# EAGLE board Breathalyzer Board Smaller Experiment (EAGLE 7.2.0)
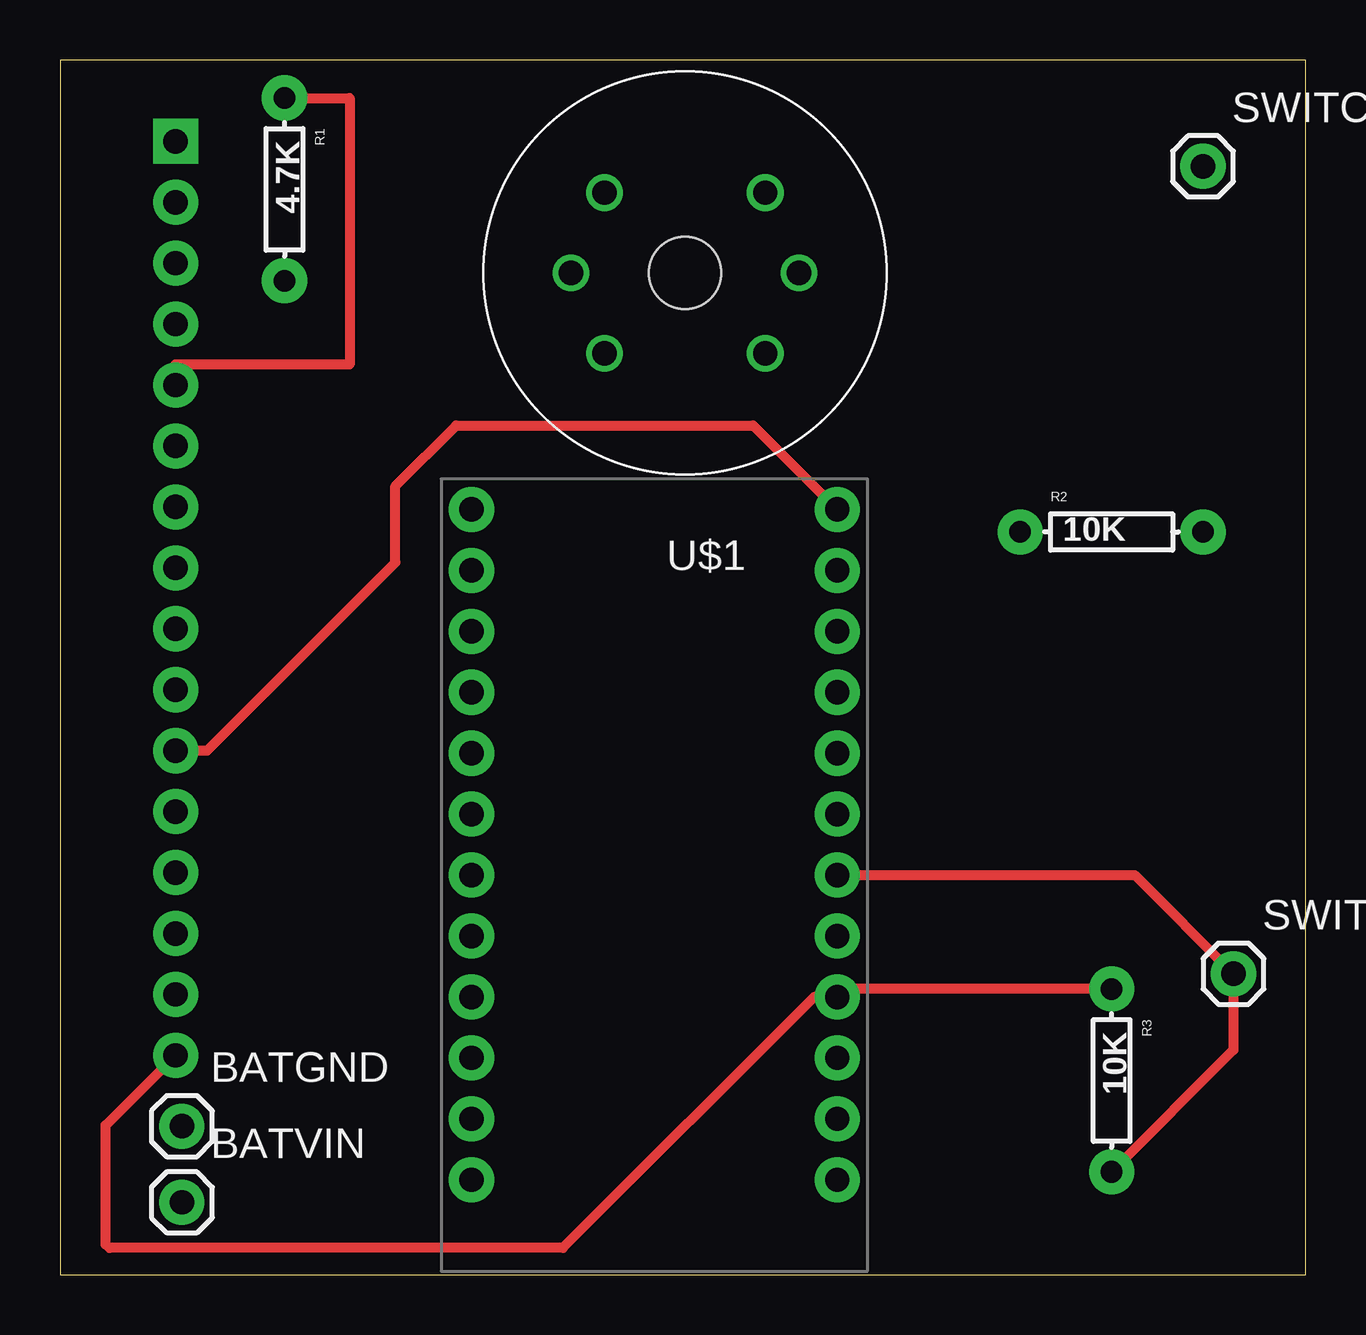
[diagram p0: board, top side]
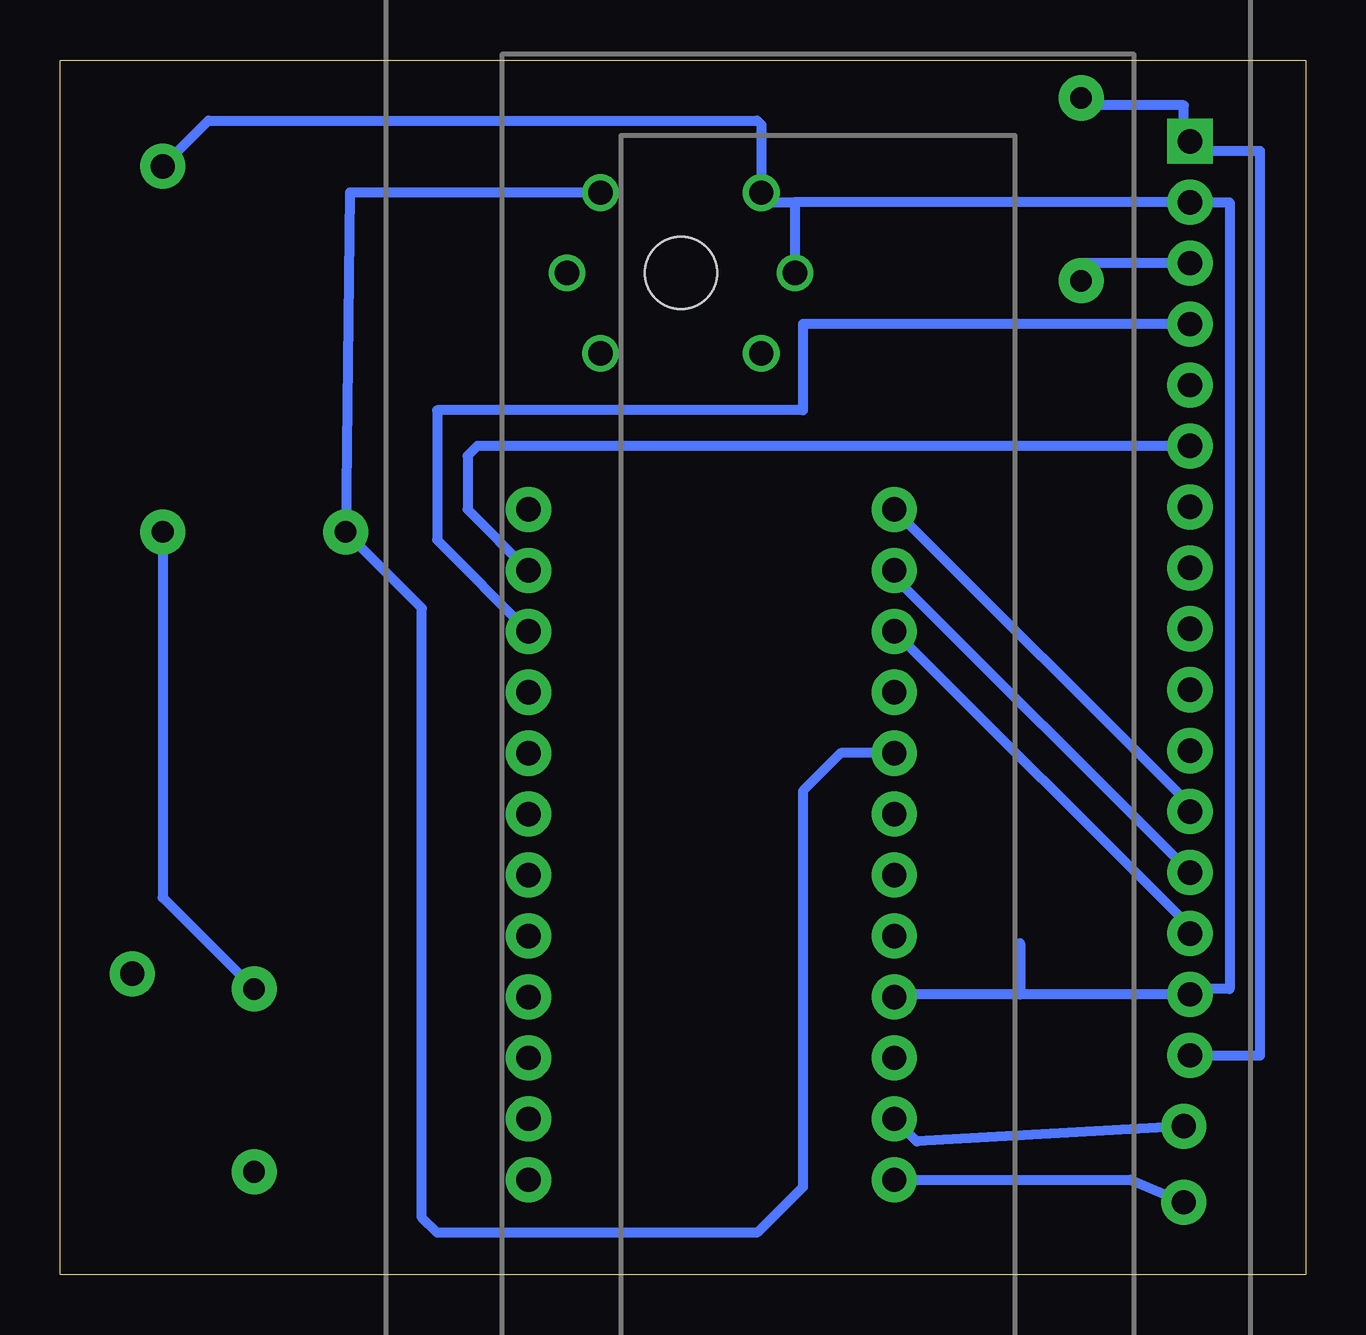
[diagram p1: board, bottom side, seen from below]

Size 51.91 x 50.63 mm. Coordinates in mm from the lower left corner, seen from the top.
Outline: 0,0 51.91,0 51.91,50.63 0,50.63 0,0
Copper layers (1*16): Top 0.035mm / dielectric 1.5mm / Bottom 0.035mm
Design rules "dirt_cheap_dirty_boards.v1": minimum track width 5mil, minimum drill 12mil, track to track 5mil, track to pad 5mil, pad to pad 5mil, via to via 5mil, smd to smd 0mil, copper to edge 10mil, drill to drill 10mil, minimum pad ring 10mil, minimum via ring 6mil, stop-mask expansion 2mil, vias tented up to drill 25mil, thermal gap 10mil

## Footprints (pad centres in the part's own frame; a part is rotated, then mirrored left to right if it is on the bottom)
1X01 = drill 1.016 pad 1.88: 1 0,0
AXIAL-0.3 = drill 0.9 pad 1.88: P$1 -3.81,0; P$2 3.81,0
LCD-16X2_NOHOLES = drill 1.016 pad 1.88 square: 1 -32,15.5 | drill 1.016 pad 1.88: 2 -29.46,15.5; 3 -26.92,15.5; 4 -24.38,15.5; 5 -21.84,15.5; 6 -19.3,15.5; 7 -16.76,15.5; 8 -14.22,15.5; 9 -11.68,15.5; 10 -9.14,15.5; 11 -6.6,15.5; 12 -4.06,15.5; 13 -1.52,15.5; 14 1.02,15.5; 15 3.56,15.5; 16 6.1,15.5
MQ-3 = drill 1.016: A1 -3.35,3.35; A2 -3.35,-3.35; B1 3.35,3.35; B2 3.35,-3.35; HA -4.75,0; HB 4.75,0 | hole 3: 0,0
ARDUINO_MINI = drill 1.016 pad 1.88: 1 -7.62,12.7; 2 -7.62,10.16; 3 -7.62,7.62; 4 -7.62,5.08; 5 -7.62,2.54; 6 -7.62,0; 7 -7.62,-2.54; 8 -7.62,-5.08; 9 -7.62,-7.62; 10 -7.62,-10.16; 11 -7.62,-12.7; 12 -7.62,-15.24; 13 7.62,-15.24; 14 7.62,-12.7; 15 7.62,-10.16; 16 7.62,-7.62; 17 7.62,-5.08; 18 7.62,-2.54; 19 7.62,0; 20 7.62,2.54; 21 7.62,5.08; 22 7.62,7.62; 23 7.62,10.16; 24 7.62,12.7

## Placement (x,y rotation side)
BATGND  M01PTH  [1X01]  5.08,6.19 0 top
BATVIN  M01PTH  [1X01]  5.08,3.02 0 top
FRAME1  FRAME-LETTER  [CREATIVE_COMMONS]  -75.56,43.66 0 top  (outside the outline)
R1  4.7K  [AXIAL-0.3]  9.36,45.24 270 top
R2  10K  [AXIAL-0.3]  43.81,30.96 0 top
R3  10K  [AXIAL-0.3]  43.81,8.1 270 top
SWITCHGND  M01PTH  [1X01]  48.9,12.54 0 top
SWITCHVIN  M01PTH  [1X01]  47.62,46.2 0 top
U1  LCD-16X2NOHOLES  [LCD-16X2_NOHOLES]  20.32,15.25 270 bottom
U2  GAS_SENSOR  [MQ-3]  26.04,41.75 0 top
U$1  ARDUINO_MINI  [ARDUINO_MINI]  24.77,16.66 180 top

## Library data of the parts
BATGND BATVIN SWITCHGND SWITCHVIN = SparkFun-Connectors
FRAME1 = SparkFun-Aesthetics
R1 R2 = SparkFun-Resistors
R3 = SparkFun-Passives
U1 = SparkFun-Displays
U2 = SparkFun-Sensors
U$1 = SparkFun-Boards

## Nets
A0: R2.P$1 U2.B1 U$1.17
D3: R3.P$2 SWITCHGND.1 U$1.6
D7: U1.4 U$1.10
D8: U1.6 U$1.11
D9: U1.11 U$1.12
D10: U1.12 U$1.13
D11: U1.13 U$1.14
D12: U1.14 U$1.15
GND: R1.P$1 R2.P$2 R3.P$1 U1.1 U1.5 U1.16 U$1.4
N$1: BATVIN.1 U$1.24
N$2: BATGND.1 U$1.23
N$4: R1.P$2 U1.3
VCC: SWITCHVIN.1 U1.2 U1.15 U2.A1 U2.HA U$1.21

## Tracks (layer width: path | path; a pad name or v marks a point on that pad's centre or on a via)
A0
  Bottom 0.406: U2.B1 39.83,45.1 R2.P$1 36.83,27.79 36.83,2.38 36.2,1.75 22.86,1.75 20.96,3.65 20.96,20.17 19.38,21.74 U$1.17
D3
  Top 0.406: U$1.6 44.78,16.66 SWITCHGND.1 48.9,9.37 R3.P$2
D7
  Bottom 0.406: U1.4 20.96,39.62 20.96,36.04 36.2,36.04 36.2,30.63 U$1.10
D8
  Bottom 0.406: U1.6 34.52,34.55 34.93,34.14 34.93,31.9 U$1.11
D9
  Top 0.406: U1.11 6.12,21.85 13.97,29.69 13.97,32.86 16.51,35.41 28.88,35.41 U$1.12
D10
  Bottom 0.406: U1.12 4.82,19.57 U$1.13
D11
  Bottom 0.406: U$1.14 17.14,29.09 U1.13
D12
  Bottom 0.406: U1.14 4.82,14.5 U$1.15
GND
  Top 0.406: R1.P$1 12.06,49.05 12.06,37.94 4.82,37.94 U1.5 | R3.P$1 32.71,11.91 U$1.4 31.42,11.58 20.96,1.11 2.06,1.11 1.91,1.27 1.91,6.23 U1.16
  Bottom 0.406: U1.16 1.91,9.14 1.91,46.83 4.82,46.83 U1.1 5.08,47.24 5.08,48.74 9.36,48.74 R1.P$1 | R2.P$2 47.62,15.72 R3.P$1
N$1
  Bottom 0.406: U$1.24 7.29,3.96 BATVIN.1
N$2
  Bottom 0.406: BATGND.1 16.21,5.56 U$1.23
N$4
  Bottom 0.406: U1.3 9.36,42.16 R1.P$2
VCC
  Bottom 0.406: 11.9,11.68 U1.15 4.82,11.91 3.17,11.91 3.17,44.7 U1.2 21.29,44.7 | 11.9,11.68 17.14,11.68 U$1.21 | 11.9,13.82 11.9,11.68 | 21.29,44.7 22.69,44.7 U2.A1 22.69,47.93 22.86,48.1 45.72,48.1 SWITCHVIN.1 | 21.29,44.7 U2.HA